# Altium PCB PCB_Rev1.1.PcbDoc (part 2 of 4)
Units mm, origin at the board's own origin, x right, y up, seen from the top; angles counter-clockwise.
Board outline 81.62 x 96.13 mm, 4 copper layers (Top Layer, GND, PWR, Bottom Layer), stack 1.49 mm thick; 185 components, 276 nets, 1052 pads, 353 vias.
Unrouted connection lines stored in the file: 133.
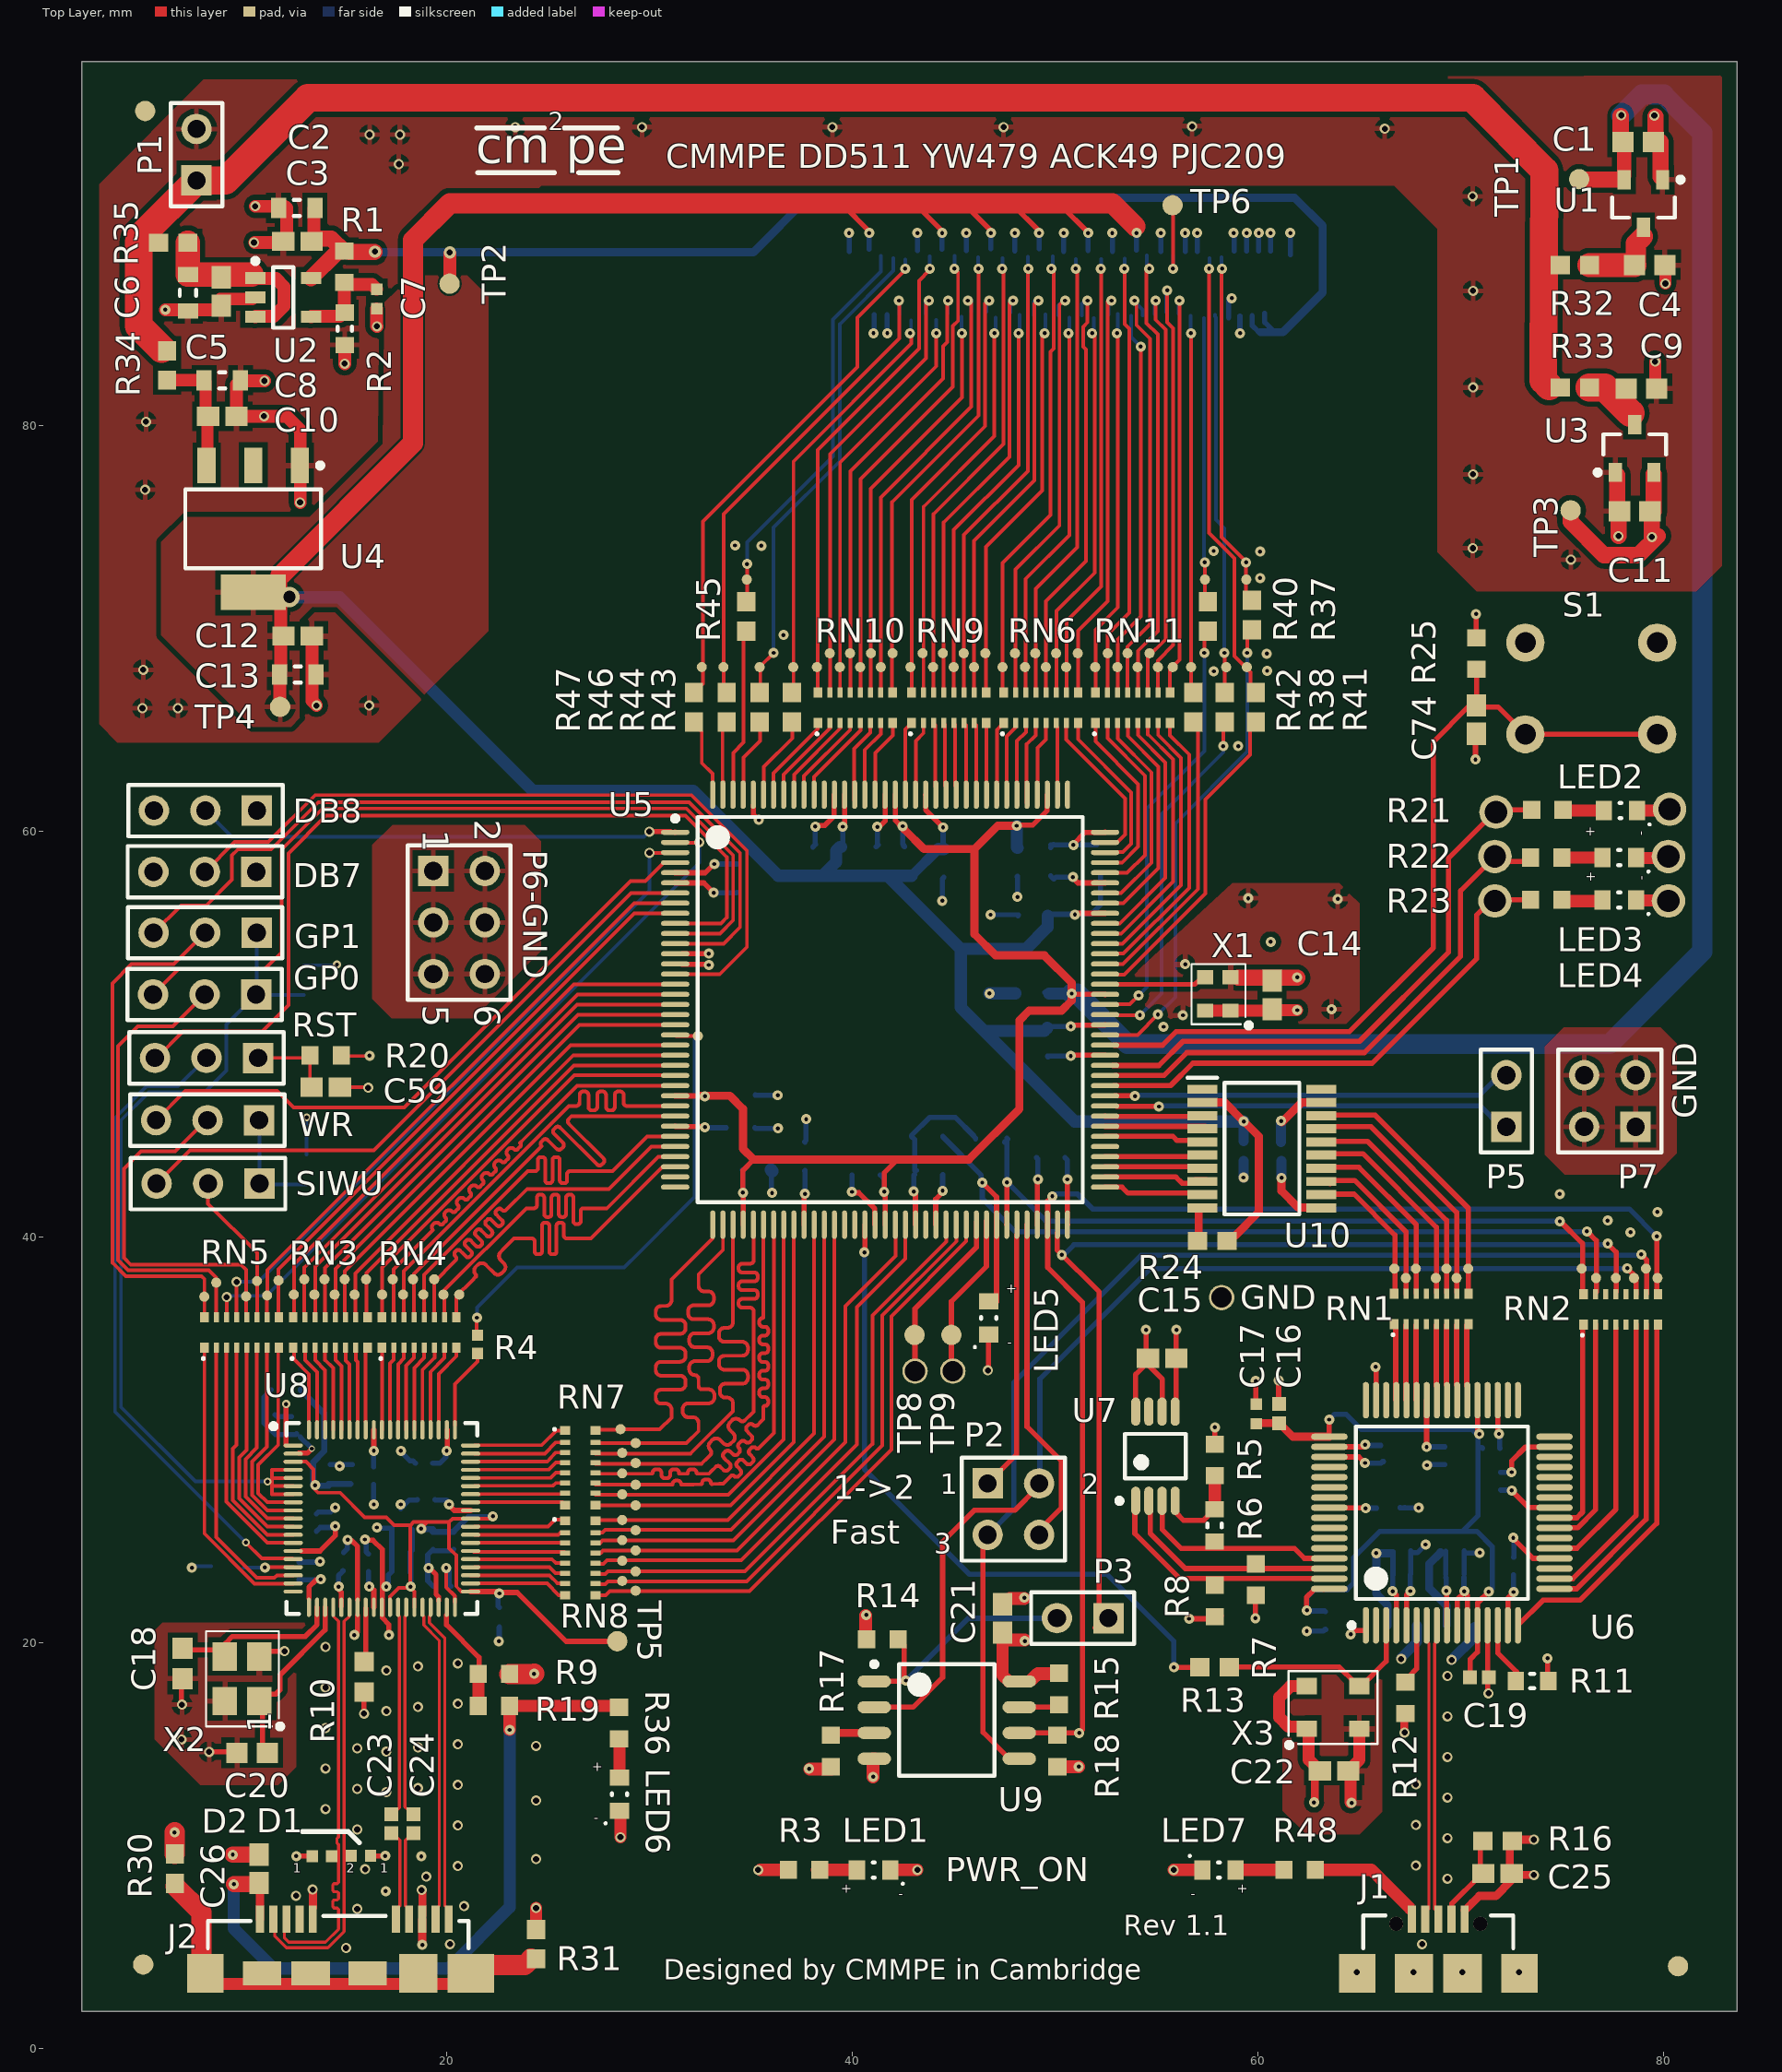
[diagram p0: Top Layer view]

## Part data (continued)
U9: library part Flash, "NOR Flash SPI FLASH NOR SLC 32MX4 SOIC", Manufacture=Micron, Created By="Daoming Dong", Datasheet URL.=https://www.mouser.co.uk/datasheet/2/671/MT25Q_QLHS_L_128_ABA_0-1287003.pdf, Date Created=05-Mar-2019, Manufacture No.="MT25QL128ABA1ESE-0SIT TR", Mouser No.=340-224871-REEL
U10: library part Level_Shfter_8bits, "Integrated Circuit", Manufacturer_Name="Texas Instruments", Mouser Part Number=595-TXS0108EPWR, Datasheet Link=http://www.ti.com/lit/ds/symlink/txs0108e.pdf, Height=1.2mm, Manufacturer_Part_Number=TXS0108EPWR, Mouser Price/Stock=https://www.mouser.com/Search/Refine.aspx?Keyword=595-TXS0108EPWR
X1: library part 24MHzOscillator, "Standard Clock Oscillators MEMS Oscillator, Ultra Low Power, LVCMOS, -40C-85C, 25ppm, 2.5x2.0mm", Frequency="24 MHz", Frequency Stability="25 PPM", Manufacture=Microchip, Created By="Daoming Dong", Datasheet URL.=https://www.mouser.co.uk/datasheet/2/268/20005624B-1149202.pdf, Date Created=12-Mar-2019, Manufacture No.=DSC6101JI2A-024.0000, Mouser No.=579-C6101JI2A0240000
X2: library part 30MHzOscillator, "Crystals 30.000MHz 18pF 30ppm -40C +85C", Component Name="30MHz Oscillator", Created By="Youchao Wang", Datasheet URL.=https://www.mouser.co.uk/datasheet/2/3/ABM8G-10572.pdf, Date Created="29th Aug 2019", Manufacture No.=ABM8G-30.000MHZ-18-D2Y-T, Mouser Stock No.=815-ABM8G-30-18D2Y
X3: library part 12MHzOscillator, "Standard Clock Oscillators 12MHz 3.3V 10ppm -40C +85C", Frequency Stability="10 PPM", Component Name="12 MHz Crystal Oscillators", Datasheet URL.=https://www.mouser.co.uk/datasheet/2/122/ECS-3225S-1064150.pdf, Date Created=12-Mar-2019, Manufacture No.=ECS-3225S33-120-FN-TR, Mouser No.=520-3225S33-120-FNT

## Free pads (board coordinates)
  round 1.25 hole 1 mask+0.076: 1(43.079,33.381) 1(44.944,33.381) 1(58.202,37.005)
  round 1.65 hole 1.1 mask+0.076: 1(71.682,56.563) 1(71.682,58.755) 1(71.736,60.943) 1(80.239,56.563) 1(80.239,58.755) 1(80.293,61.086)
  round 0.5 smd: 2(8.029,37.05) 2(8.62,37.746) 2(10.09,37.067) 2(10.628,37.821) 2(11.126,37.108) 2(11.691,37.848) 2(12.443,37.153) 2(12.96,37.907) 2(13.457,37.153) 2(13.954,37.907) 2(14.452,37.153) 2(14.949,37.907) 2(15.441,37.153) 2(16.009,37.907) 2(16.801,37.153) 2(17.321,37.907) 2(17.832,37.153) 2(18.322,37.907) 2(18.831,37.153) 2(19.369,37.907) 2(19.821,37.153) 2(20.604,37.153) 2(28.559,30.519) 2(28.638,23.037) 2(28.638,24.032) 2(28.638,25.046) 2(28.638,26.042) 2(28.638,27.306) 2(28.638,28.342) 2(28.638,29.347) 2(29.302,22.551) 2(29.302,23.501) 2(29.302,24.542) 2(29.302,25.538) 2(29.302,26.763) 2(29.302,27.777) 2(29.302,28.847) 2(29.302,29.833) 2(32.564,68.096) 2(33.631,68.096) 2(34.784,72.411) 2(35.42,68.096) 2(37.074,68.096) 2(38.245,68.096) 2(38.879,68.777) 2(39.37,68.096) 2(39.879,68.777) 2(40.376,68.096) 2(40.907,68.777) 2(41.392,68.096) 2(41.974,68.777) 2(42.855,68.096) 2(43.453,68.777) 2(43.973,68.096) 2(44.453,68.777) 2(44.989,68.096) 2(45.481,68.777) 2(45.995,68.096) 2(46.548,68.777) 2(47.395,68.096) 2(48.013,68.777) 2(48.504,68.096) 2(49.013,68.777) 2(49.53,68.096) 2(50.041,68.777) 2(50.536,68.096) 2(51.108,68.777) 2(51.967,68.096) 2(52.587,68.777) 2(53.065,68.096) 2(53.563,68.777) 2(54.052,68.096) 2(54.646,68.777) 2(55.057,68.096) 2(55.794,68.095) 2(56.697,68.096) 2(57.383,72.411) 2(58.43,68.092) 2(59.419,72.411) 2(59.445,68.096) 2(66.719,38.433) 2(67.287,37.97) 2(67.78,38.433) 2(68.766,37.97) 2(69.291,38.433) 2(69.784,37.97) 2(70.363,38.433) 2(75.959,38.433) 2(76.669,37.97) 2(77.644,37.97) 2(78.536,37.97) 2(79.13,38.433) 2(79.697,37.97)
  round 1 smd paste-1 mask+0.5: ""(5.016,4.123) ""(5.111,95.513) ""(80.712,4.037)
  round 1 smd far side paste-1 mask+0.5: ""(5.016,4.123) ""(5.105,95.513) ""(80.712,4.037)

## Via types
v1: diameter 0.5, hole 0.2, Top Layer to Bottom Layer, tented both sides, 238 vias
v2: diameter 0.5, hole 0.3, Top Layer to Bottom Layer, tented both sides, 106 vias
v3: diameter 0.4, hole 0.2, Top Layer to Bottom Layer, tented both sides, 5 vias
v4: diameter 0.6, hole 0.3, Top Layer to Bottom Layer, tented both sides, 2 vias
v5: diameter 1, hole 0.6, Top Layer to Bottom Layer, tented both sides, 1 vias
v6: diameter 0.3, hole 0.2, Top Layer to Bottom Layer, tented both sides, 1 vias

## Nets (pads, with @x,y where several pads share a name; then routed paths per layer and width w, separated by ;. In a path a pad name is that pad's centre, name@x,y a point inside that pad or via, vN(x,y) a via of type N, cw(c..) or ccw(c..) an arc to the next point about the centre after c; other vN are vias at no path point)
C\T\S\: U5.76 U10.6 | length 5
  Top Layer w0.254: U5.76@52.453,43.951 56.69,43.951 56.848,44.109 U10.6@57.432,44.109
CTSRN: pad.2@68.766,37.97 RN1.12 U10.15 | length 9.7
  Top Layer w0.254: U10.15@63.861,44.099 65.175,44.099 68.797,40.477 RN1.12@68.797,37.246
D0: RN8.8 U8.40 | length 4.9
  Top Layer w0.18: U8.40@21.163,22.911 24.93,22.911 25.511,22.33 RN8.8@25.831,22.33
D1: RN8.7 U8.41 | length 4.8
  Top Layer w0.18: U8.41@21.163,23.311 25.053,23.311 25.448,22.917 RN8.7@25.831,22.917
D2: RN8.6 U8.42 | length 4.6
  Top Layer w0.18: U8.42@21.376,23.711 25.052,23.711 25.346,23.417 RN8.6@25.831,23.417
D3: RN8.5 U8.43 | length 4.3
  Top Layer w0.18: U8.43@21.364,24.111 25.171,24.111 25.372,23.91 RN8.5@25.601,23.91
D4: RN8.4 U8.44 | length 4.5
  Top Layer w0.18: U8.44@21.319,24.461 RN8.4@25.774,24.461
D5: RN8.3 U8.45 | length 4.5
  Top Layer w0.18: U8.45@21.376,24.911 RN8.3@25.831,24.911
D6: RN8.2 U8.46 | length 4.5
  Top Layer w0.18: U8.46@21.376,25.311 25.495,25.311 25.601,25.417 RN8.2@25.831,25.417
D7: RN8.1 U8.47 | length 4.6
  Top Layer w0.18: U8.47@21.376,25.711 24.978,25.711 25.316,26.048 RN8.1@25.822,26.048
D8: RN7.8 U8.50 | length 4.5
  Top Layer w0.18: U8.50@21.376,26.911 25.699,26.911 RN7.8@25.831,26.779
D9: RN7.7 U8.51 | length 4.2
  Top Layer w0.18: U8.51@21.624,27.307 RN7.7@25.831,27.329
D10: RN7.6 U8.52 | length 4.5
  Top Layer w0.18: U8.52@21.376,27.711 25.23,27.731 25.361,27.864 RN7.6@25.831,27.866
D11: RN7.5 U8.53 | length 4.6
  Top Layer w0.18: U8.53@21.376,28.111 25.127,28.131 25.362,28.366 RN7.5@25.831,28.366
D12: RN7.4 U8.54 | length 4.6
  Top Layer w0.18: U8.54@21.376,28.511 25.027,28.531 25.362,28.866 RN7.4@25.831,28.866
D13: RN7.3 U8.55 | length 4.6
  Top Layer w0.18: U8.55@21.376,28.911 24.927,28.911 25.345,29.352 RN7.3@25.831,29.366
D14: RN7.2 U8.56 | length 4.7
  Top Layer w0.18: U8.56@21.376,29.311 24.827,29.311 25.348,29.855 RN7.2@25.831,29.866
D15: RN7.1 U8.57 | length 4.8
  Top Layer w0.18: U8.57@21.376,29.711 24.675,29.73 25.387,30.451 RN7.1@25.831,30.454
D16: RN4.8 U8.60 | length 4.4
  Top Layer w0.18: U8.60@19.588,30.486 19.588,33.241 20.461,34.114 RN4.8@20.461,34.529
D17: RN4.7 U8.61 | length 4.2
  Top Layer w0.18: U8.61@19.188,30.486 19.188,33.342 19.876,34.029 RN4.7@19.876,34.358
D18: RN4.6 U8.62 | length 4.3
  Top Layer w0.18: U8.62@18.788,30.486 18.788,33.441 19.38,34.033 RN4.6@19.38,34.529
D19: RN4.5 U8.63 | length 4.2
  Top Layer w0.18: U8.63@18.388,30.486 18.388,33.542 18.873,34.026 RN4.5@18.873,34.529
D20: RN4.4 U8.64 | length 4.2
  Top Layer w0.18: U8.64@17.988,30.486 17.988,33.641 18.373,34.027 RN4.4@18.373,34.529
D21: RN4.3 U8.65 | length 3.7
  Top Layer w0.18: U8.65@17.596,30.897 17.596,33.725 17.873,34.002 RN4.3@17.873,34.529